# EAGLE board QTouchShield (EAGLE 6.2), part 1 of 2
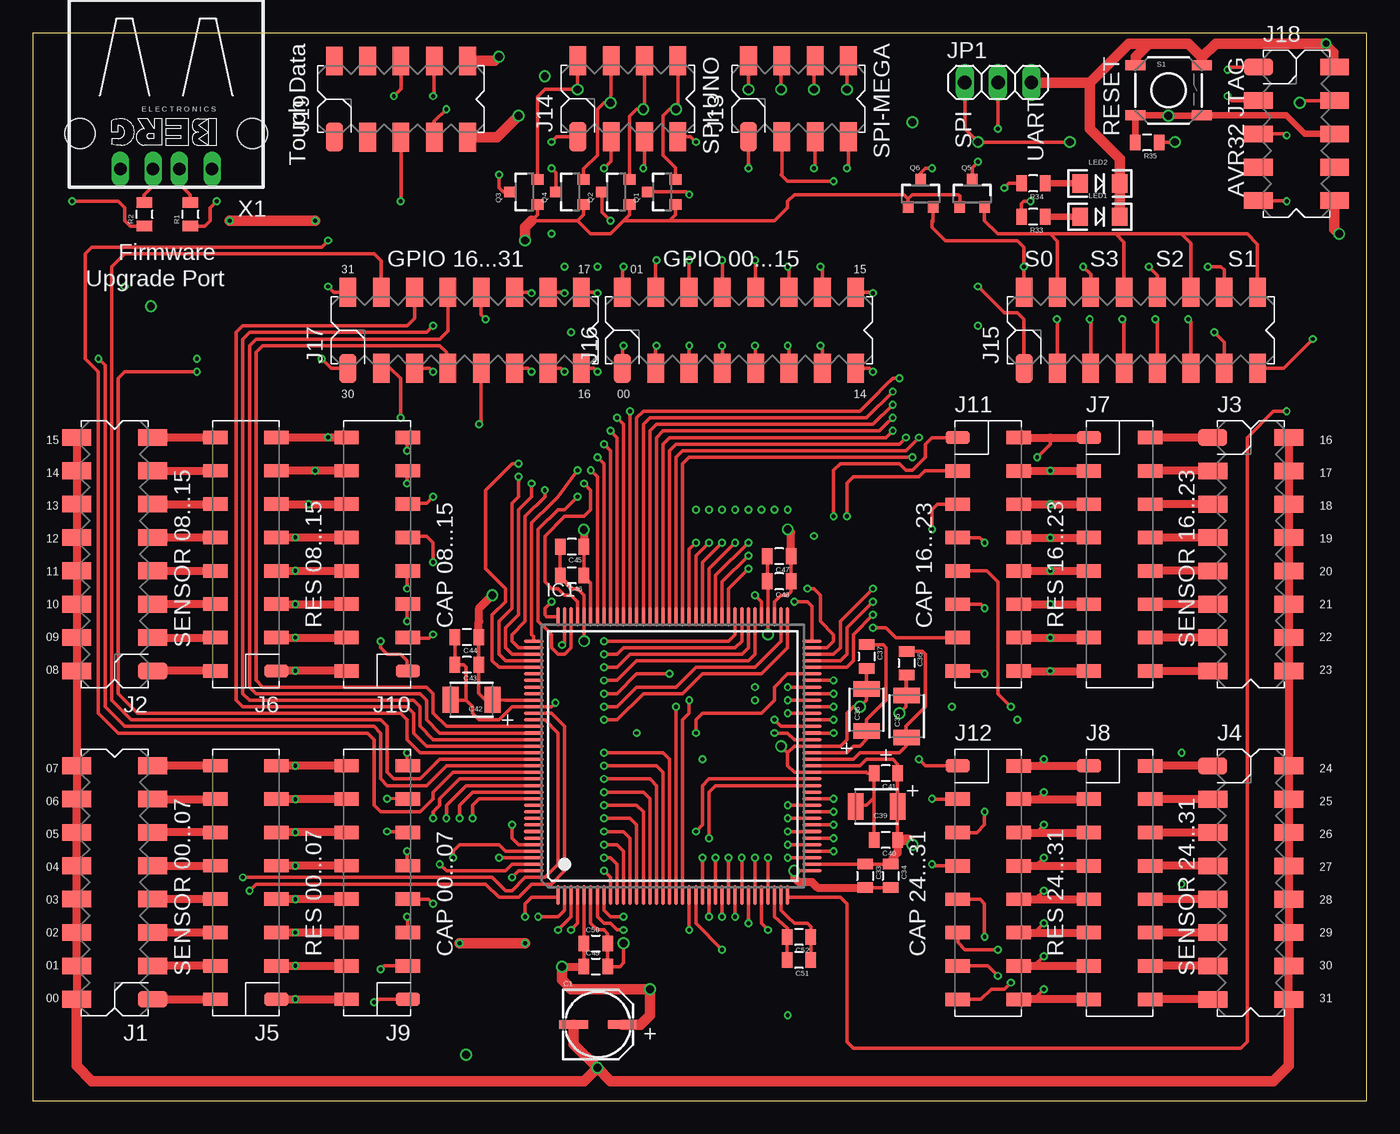
[diagram p0: board, top side]
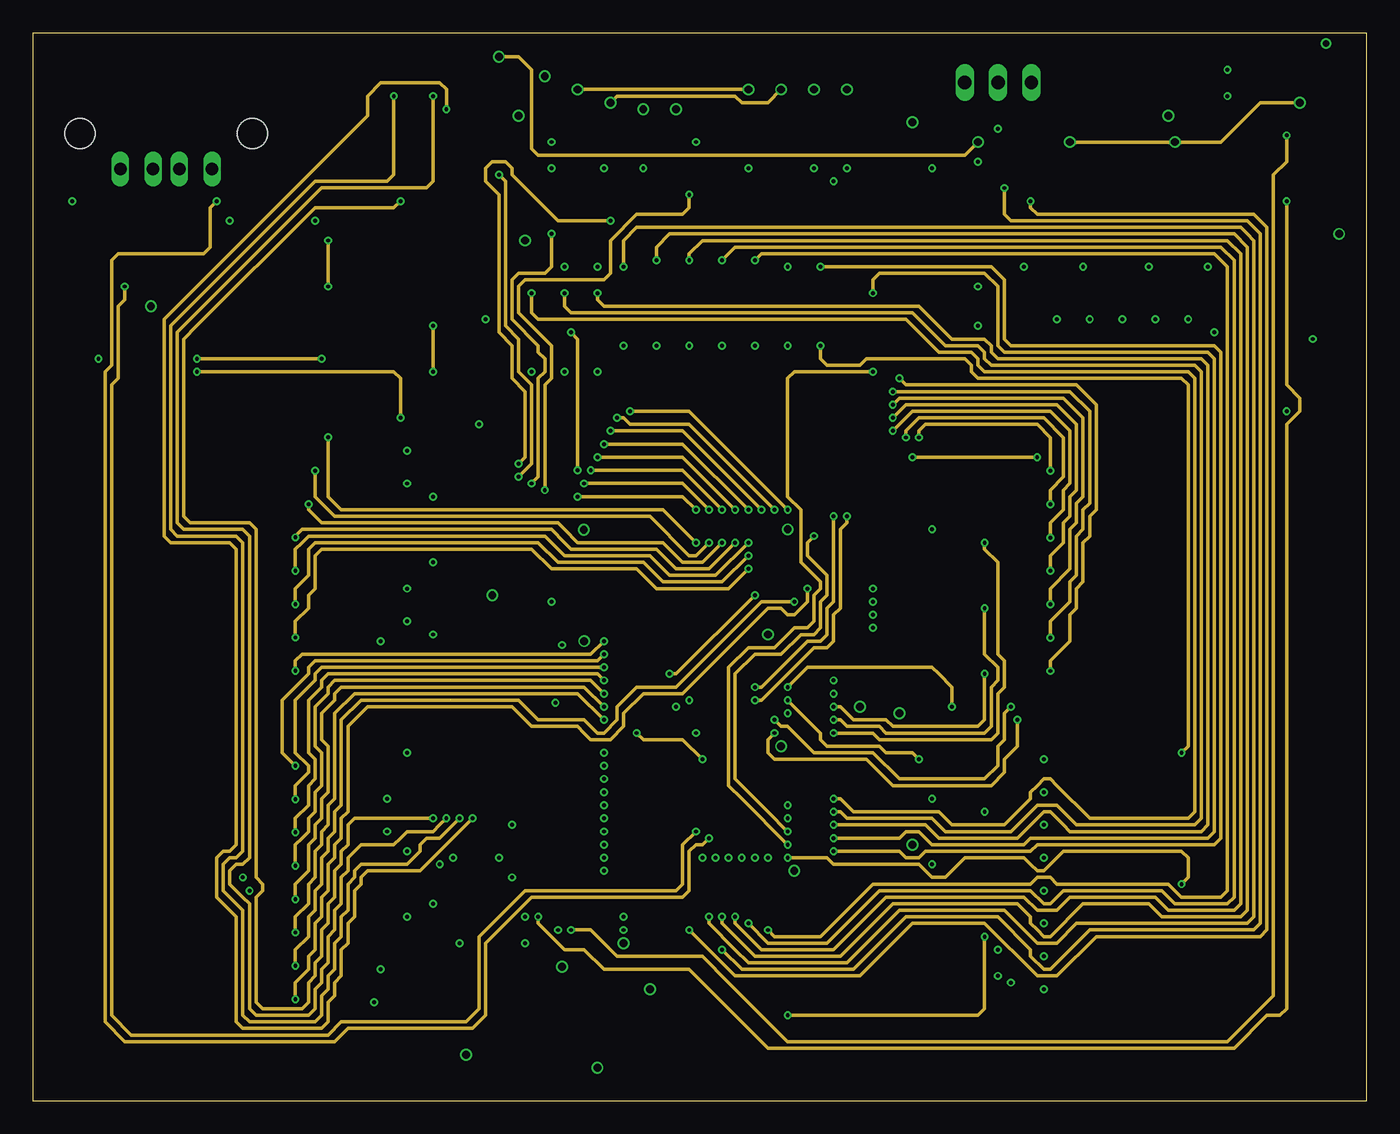
[diagram p1: board, inner layer Route2]
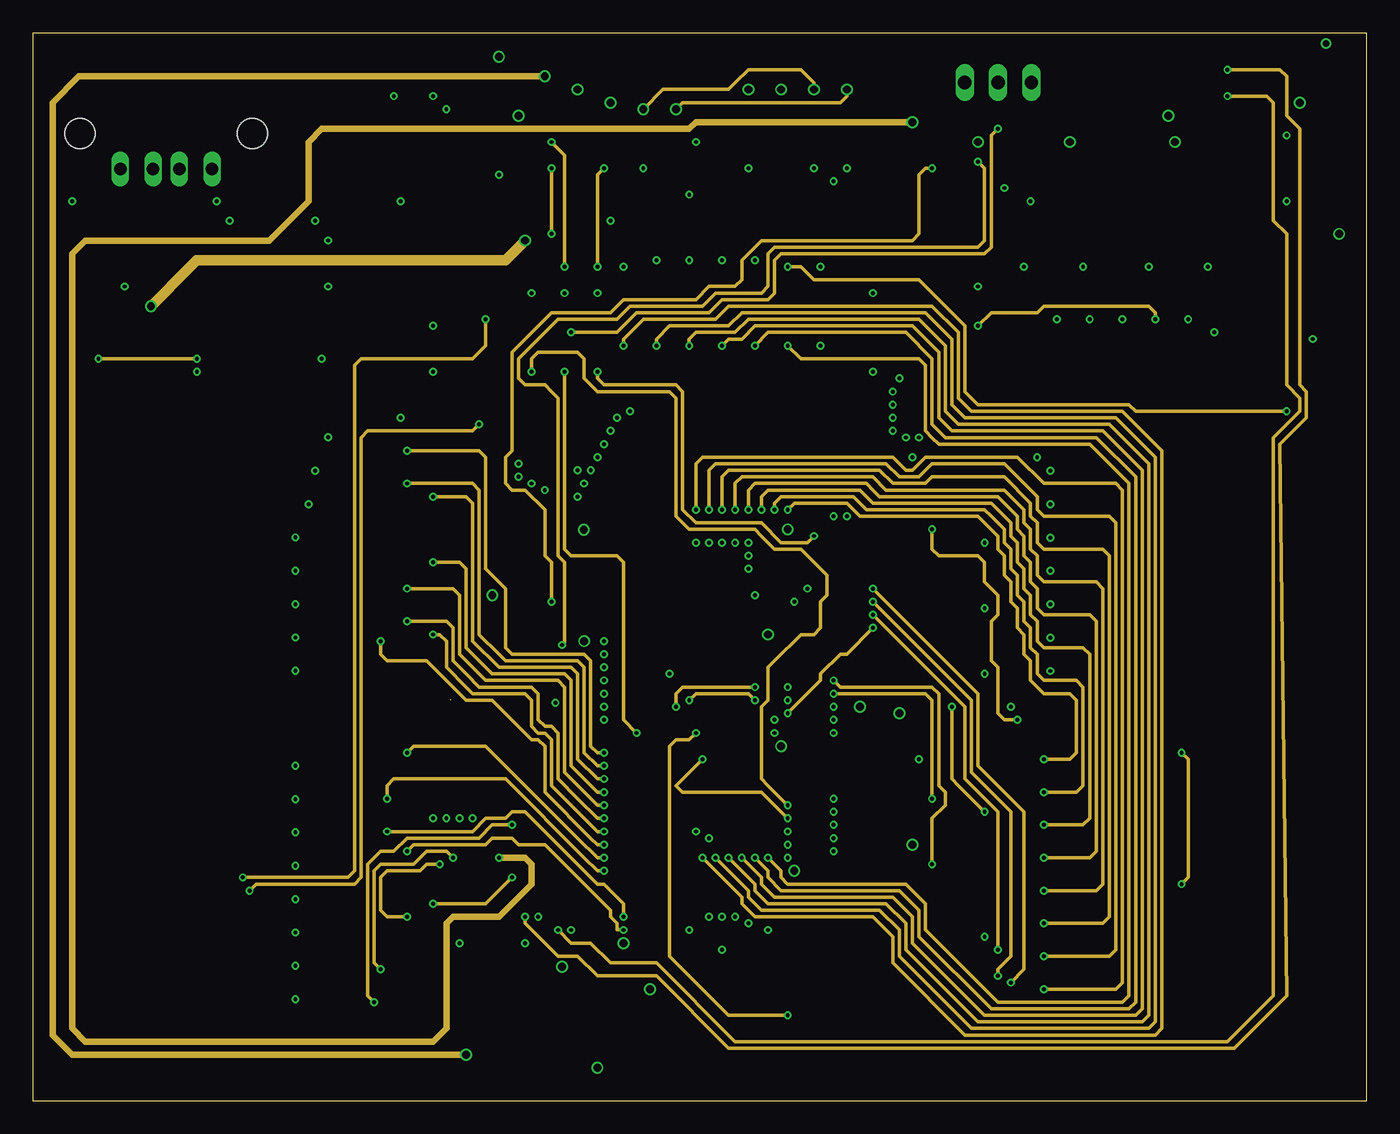
[diagram p2: board, inner layer Route15]
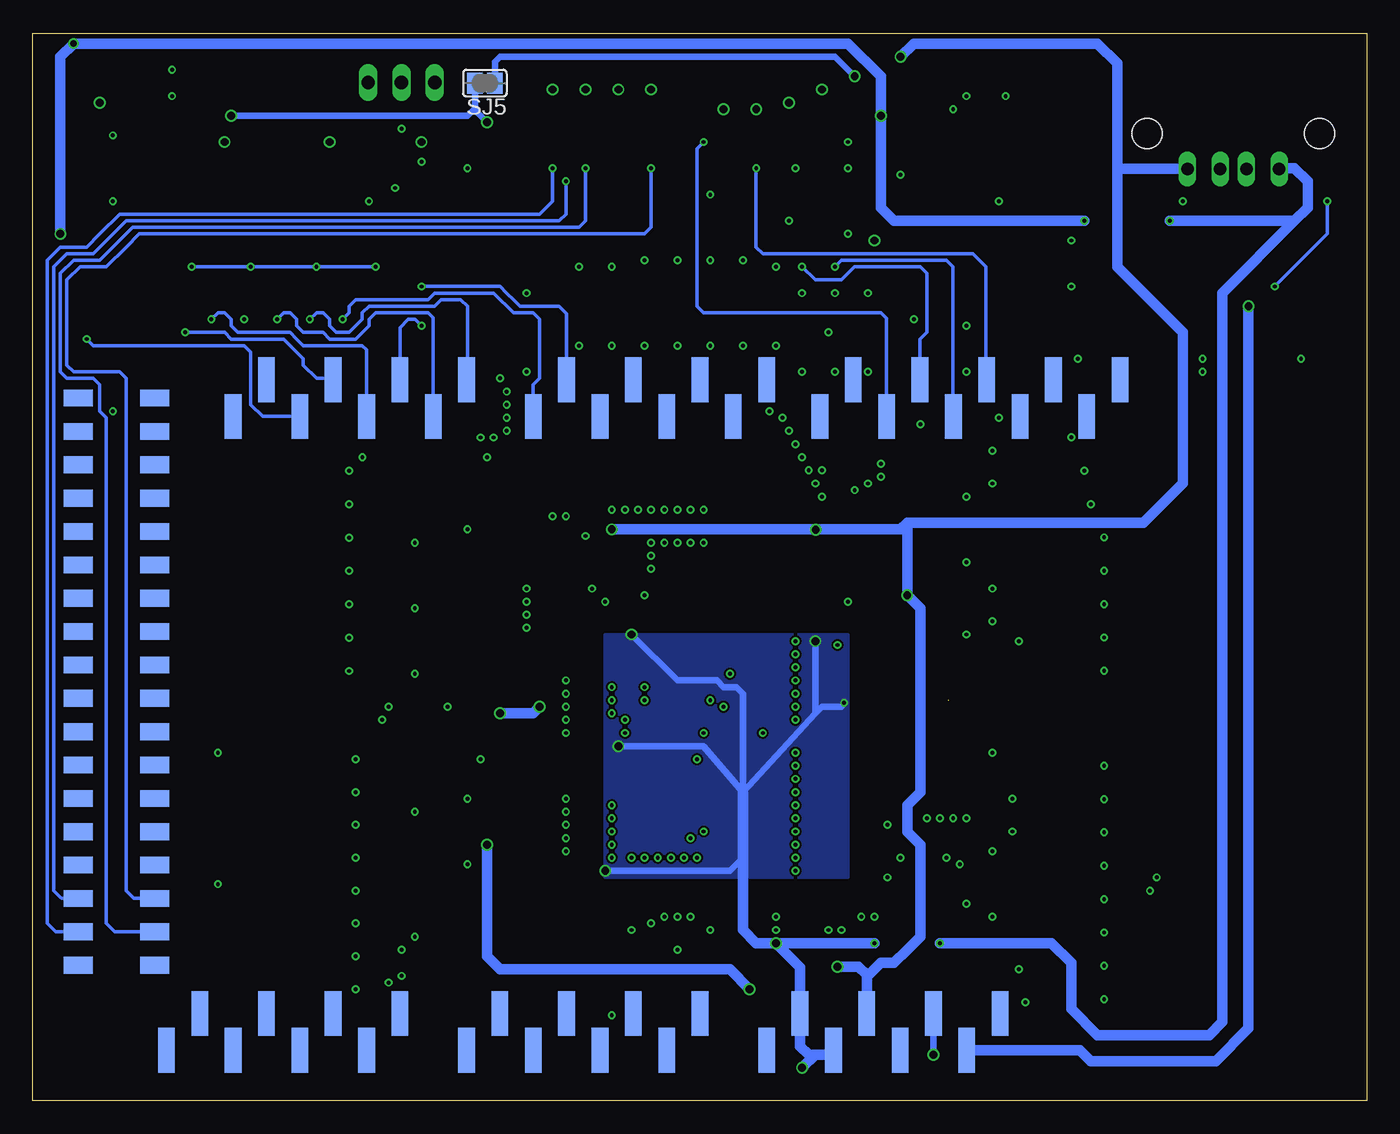
[diagram p3: board, bottom side, seen from below]

Size 101.6 x 81.28 mm. Coordinates in mm from the lower left corner, seen from the top.
Outline: 0,0 101.6,0 101.6,81.28 0,81.28 0,0
Copper layers (1*2+15*16): Top 0.035mm / dielectric 0.38mm / Route2 0.035mm / dielectric 0.71mm / Route15 0.035mm / dielectric 0.38mm / Bottom 0.035mm
Design rules: minimum track width 0.15mm, minimum drill 0.3mm, track to track 0.15mm, track to pad 0.15mm, pad to pad 0.15mm, via to via 0.15mm, smd to smd 0.15mm, copper to edge 0.3mm, drill to drill 0.2mm, minimum pad ring 0.2mm, minimum via ring 0.15mm, stop-mask expansion 0.075mm, vias tented up to drill 0mil, thermal gap 0.2mm

## Footprints (pad centres in the part's own frame; a part is rotated, then mirrored left to right if it is on the bottom)
PANASONIC_C = smd 2.2 x 0.65: + 1.9,-0.2; - -1.8,-0.2
0805 = smd 0.8 x 1.2: 1 -0.9,0; 2 0.9,0
1210 = smd 1.2 x 2: 1 -1.6,0; 2 1.6,0
LQFP144 = smd 0.25 x 1.5: 1 -8.75,-10.6; 2 -8.25,-10.6; 3 -7.75,-10.6; 4 -7.25,-10.6; 5 -6.75,-10.6; 6 -6.25,-10.6; 7 -5.75,-10.6; 8 -5.25,-10.6; 9 -4.75,-10.6; 10 -4.25,-10.6; 11 -3.75,-10.6; 12 -3.25,-10.6; 13 -2.75,-10.6; 14 -2.25,-10.6; 15 -1.75,-10.6; 16 -1.25,-10.6; 17 -0.75,-10.6; 18 -0.25,-10.6; 19 0.25,-10.6; 20 0.75,-10.6; 21 1.25,-10.6; 22 1.75,-10.6; 23 2.25,-10.6; 24 2.75,-10.6; 25 3.25,-10.6; 26 3.75,-10.6; 27 4.25,-10.6; 28 4.75,-10.6; 29 5.25,-10.6; 30 5.75,-10.6; 31 6.25,-10.6; 32 6.75,-10.6; 33 7.25,-10.6; 34 7.75,-10.6; 35 8.25,-10.6; 36 8.75,-10.6; 73 8.75,10.6; 74 8.25,10.6; 75 7.75,10.6; 76 7.25,10.6; 77 6.75,10.6; 78 6.25,10.6; 79 5.75,10.6; 80 5.25,10.6; 81 4.75,10.6; 82 4.25,10.6; 83 3.75,10.6; 84 3.25,10.6; 85 2.75,10.6; 86 2.25,10.6; 87 1.75,10.6; 88 1.25,10.6; 89 0.75,10.6; 90 0.25,10.6; 91 -0.25,10.6; 92 -0.75,10.6; 93 -1.25,10.6; 94 -1.75,10.6; 95 -2.25,10.6; 96 -2.75,10.6; 97 -3.25,10.6; 98 -3.75,10.6; 99 -4.25,10.6; 100 -4.75,10.6; 101 -5.25,10.6; 102 -5.75,10.6; 103 -6.25,10.6; 104 -6.75,10.6; 105 -7.25,10.6; 106 -7.75,10.6; 107 -8.25,10.6; 108 -8.75,10.6 | smd 1.5 x 0.25: 37 10.6,-8.75; 38 10.6,-8.25; 39 10.6,-7.75; 40 10.6,-7.25; 41 10.6,-6.75; 42 10.6,-6.25; 43 10.6,-5.75; 44 10.6,-5.25; 45 10.6,-4.75; 46 10.6,-4.25; 47 10.6,-3.75; 48 10.6,-3.25; 49 10.6,-2.75; 50 10.6,-2.25; 51 10.6,-1.75; 52 10.6,-1.25; 53 10.6,-0.75; 54 10.6,-0.25; 55 10.6,0.25; 56 10.6,0.75; 57 10.6,1.25; 58 10.6,1.75; 59 10.6,2.25; 60 10.6,2.75; 61 10.6,3.25; 62 10.6,3.75; 63 10.6,4.25; 64 10.6,4.75; 65 10.6,5.25; 66 10.6,5.75; 67 10.6,6.25; 68 10.6,6.75; 69 10.6,7.25; 70 10.6,7.75; 71 10.6,8.25; 72 10.6,8.75; 109 -10.6,8.75; 110 -10.6,8.25; 111 -10.6,7.75; 112 -10.6,7.25; 113 -10.6,6.75; 114 -10.6,6.25; 115 -10.6,5.75; 116 -10.6,5.25; 117 -10.6,4.75; 118 -10.6,4.25; 119 -10.6,3.75; 120 -10.6,3.25; 121 -10.6,2.75; 122 -10.6,2.25; 123 -10.6,1.75; 124 -10.6,1.25; 125 -10.6,0.75; 126 -10.6,0.25; 127 -10.6,-0.25; 128 -10.6,-0.75; 129 -10.6,-1.25; 130 -10.6,-1.75; 131 -10.6,-2.25; 132 -10.6,-2.75; 133 -10.6,-3.25; 134 -10.6,-3.75; 135 -10.6,-4.25; 136 -10.6,-4.75; 137 -10.6,-5.25; 138 -10.6,-5.75; 139 -10.6,-6.25; 140 -10.6,-6.75; 141 -10.6,-7.25; 142 -10.6,-7.75; 143 -10.6,-8.25; 144 -10.6,-8.75
2X8-V-MALE-SMT-HARWIN = smd 2.2 x 1.27: 1 -1.63,0; 2 4.17,0; 3 -1.63,-2.54; 4 4.17,-2.54; 5 -1.63,-5.08; 6 4.17,-5.08; 7 -1.63,-7.62; 8 4.17,-7.62; 9 -1.63,-10.16; 10 4.17,-10.16; 11 -1.63,-12.7; 12 4.17,-12.7; 13 -1.63,-15.24; 14 4.17,-15.24; 15 -1.63,-17.78; 16 4.17,-17.78
2X8-V-FEMALE-SMT-HARWIN = smd 1.85 x 1.02: 1 -1.055,0; 2 3.595,0; 3 -1.055,-2.54; 4 3.595,-2.54; 5 -1.055,-5.08; 6 3.595,-5.08; 7 -1.055,-7.62; 8 3.595,-7.62; 9 -1.055,-10.16; 10 3.595,-10.16; 11 -1.055,-12.7; 12 3.595,-12.7; 13 -1.055,-15.24; 14 3.595,-15.24; 15 -1.055,-17.78; 16 3.595,-17.78
2X4-V-MALE-SMT-HARWIN = smd 2.2 x 1.27: 1 -1.63,0; 2 4.17,0; 3 -1.63,-2.54; 4 4.17,-2.54; 5 -1.63,-5.08; 6 4.17,-5.08; 7 -1.63,-7.62; 8 4.17,-7.62
2X5-V-MALE-SMT-HARWIN = smd 2.2 x 1.27: 1 -1.63,0; 2 4.17,0; 3 -1.63,-2.54; 4 4.17,-2.54; 5 -1.63,-5.08; 6 4.17,-5.08; 7 -1.63,-7.62; 8 4.17,-7.62; 9 -1.63,-10.16; 10 4.17,-10.16
1X03 = drill 1.016 long: 1 -2.54,0; 2 0,0; 3 2.54,0
LED-1206 = smd 1.2 x 1.4: A -1.5,0; C 1.5,0
SOT23-3 = smd 0.8 x 0.9: 1 -0.95,-1; 2 0.95,-1; 3 0,1.1
TACTILE_SWITCH_SMD = smd 1.524 x 0.762: 1 -2.54,1.905; 2 2.54,1.905; 3 -2.54,-1.905; 4 2.54,-1.905
SJ = smd 1.168 x 1.6: 1 -0.762,0; 2 0.762,0
ARDUINO-2560-R3-SMD = smd 1.27 x 3.4 bottom: 3V3 -60.96,-49.66; 5V_1 -58.42,-46.86; A00 -45.72,-46.86; A01 -43.18,-49.66; A02 -40.64,-46.86; A03 -38.1,-49.66; A04 -35.56,-46.86; A05 -33.02,-49.66; A06 -30.48,-46.86; A07 -27.94,-49.66; A08 -22.86,-46.86; A09 -20.32,-49.66; A10 -17.78,-46.86; A11 -15.24,-49.66; A12 -12.7,-46.86; A13 -10.16,-49.66; A14 -7.62,-46.86; A15 -5.08,-49.66; AREF -72.635,1.4; GND_1 -55.88,-49.66; GND_2 -53.34,-46.86; GND_5 -70.095,-1.4; IOREF -66.04,-49.66; NC -68.58,-46.86; PWM02 -38.1,-1.4; PWM03 -40.64,1.4; PWM04 -43.18,-1.4; PWM05 -45.72,1.4; PWM06 -48.26,-1.4; PWM07 -50.8,1.4; PWM08 -54.855,-1.4; PWM09 -57.395,1.4; PWM10 -59.935,-1.4; PWM11 -62.475,1.4; PWM12 -65.015,-1.4; PWM13 -67.555,1.4; RESET -63.5,-46.86; RX1_19 -15.24,-1.4; RX2_17 -20.32,-1.4; RX3_15 -25.4,-1.4; RX_PWM00 -33.02,-1.4; SCA -75.175,-1.4; SCA_20 -12.7,1.4; SCL -77.715,1.4; SCL_21 -10.16,-1.4; TX1_18 -17.78,1.4; TX2_16 -22.86,1.4; TX3_14 -27.94,1.4; TX_PWM01 -35.56,1.4; VIN -50.8,-49.66 | smd 2.2 x 1.27 bottom: 5V_2 -4.17,0; 5V_3 1.63,0; 22 -4.17,-2.54; 23 1.63,-2.54; 24 -4.17,-5.08; 25 1.63,-5.08; 26 -4.17,-7.62; 27 1.63,-7.62; 28 -4.17,-10.16; 29 1.63,-10.16; 30 -4.17,-12.7; 31 1.63,-12.7; 32 -4.17,-15.24; 33 1.63,-15.24; 34 -4.17,-17.78; 35 1.63,-17.78; 36 -4.17,-20.32; 37 1.63,-20.32; 38 -4.17,-22.86; 39 1.63,-22.86; 40 -4.17,-25.4; 41 1.63,-25.4; 42 -4.17,-27.94; 43 1.63,-27.94; 44 -4.17,-30.48; 45 1.63,-30.48; 46 -4.17,-33.02; 47 1.63,-33.02; 48 -4.17,-35.56; 49 1.63,-35.56; 50 -4.17,-38.1; 51 1.63,-38.1; 52 -4.17,-40.64; 53 1.63,-40.64; GND_3 -4.17,-43.18; GND_4 1.63,-43.18
PN87520 = drill 0.95 long: 1 -3.5,2.71; 2 -1,2.71; 3 1,2.71; 4 3.5,2.71 | hole 2.3: -6.57,0; 6.57,0

## Placement (x,y rotation side)
C1  10uF/35V  [PANASONIC_C]  43,6 0 top
C33  100nF  [0805]  63.4,17.12 270 top
C34  33nF  [0805]  65.34,17.12 270 top
C35  2.2uF  [1210]  66.56,29.26 90 top
C36  470pF  [0805]  66.56,33.32 270 top
C37  470pF  [0805]  63.51,33.82 270 top
C38  2.2uF  [1210]  63.51,29.76 90 top
C39  4.7uF  [1210]  64.27,22.4 180 top
C40  100nF  [0805]  64.97,19.86 180 top
C41  33nF  [0805]  64.97,24.94 180 top
C42  4.7uF  [1210]  33.42,30.53 180 top
C43  100nF  [0805]  33.06,33.2 180 top
C44  33nF  [0805]  33.06,35.3 180 top
C45  100nF  [0805]  41.07,42.19 180 top
C46  33nF  [0805]  41.07,39.98 180 top
C47  100nF  [0805]  56.85,41.45 180 top
C48  33nF  [0805]  56.85,39.55 180 top
C49  100nF  [0805]  42.88,10.22 0 top
C50  33nF  [0805]  42.88,11.97 0 top
C51  100nF  [0805]  58.36,10.72 180 top
C52  33nF  [0805]  58.36,12.47 180 top
IC1  AT32UC3C0512CJEDEC-MS-026  [LQFP144]  48.75,26.25 0 top
J1  SENSOR 00...07  [2X8-V-MALE-SMT-HARWIN]  7.5,7.73 180 top
J2  SENSOR 08...15  [2X8-V-MALE-SMT-HARWIN]  7.5,32.73 180 top
J3  SENSOR 16...23  [2X8-V-MALE-SMT-HARWIN]  91.5,50.5 0 top
J4  SENSOR 24...31  [2X8-V-MALE-SMT-HARWIN]  91.5,25.5 0 top
J5  RES 00...07  [2X8-V-FEMALE-SMT-HARWIN]  17.5,7.73 180 top
J6  RES 08...15  [2X8-V-FEMALE-SMT-HARWIN]  17.5,32.73 180 top
J7  RES 16...23  [2X8-V-FEMALE-SMT-HARWIN]  81.5,50.5 0 top
J8  RES 24...31  [2X8-V-FEMALE-SMT-HARWIN]  81.5,25.5 0 top
J9  CAP 00...07  [2X8-V-FEMALE-SMT-HARWIN]  27.5,7.73 180 top
J10  CAP 08...15  [2X8-V-FEMALE-SMT-HARWIN]  27.5,32.73 180 top
J11  CAP 16...23  [2X8-V-FEMALE-SMT-HARWIN]  71.5,50.5 0 top
J12  CAP 24...31  [2X8-V-FEMALE-SMT-HARWIN]  71.5,25.5 0 top
J13  SPI-MEGA  [2X4-V-MALE-SMT-HARWIN]  54.51,75.03 90 top
J14  SPI-UNO  [2X4-V-MALE-SMT-HARWIN]  41.51,75.03 90 top
J15  COMMS Select  [2X8-V-MALE-SMT-HARWIN]  75.5,57.4 90 top
J16  DETECT00...15  [2X8-V-MALE-SMT-HARWIN]  44.9,57.4 90 top
J17  DETECT16...31  [2X8-V-MALE-SMT-HARWIN]  24,57.4 90 top
J18  JTAG  [2X5-V-MALE-SMT-HARWIN]  94.98,78.7 0 top
J19  TOUCH DATA  [2X5-V-MALE-SMT-HARWIN]  22.96,75 90 top
JP1  COMMS_SELECT  [1X03]  73.52,77.54 0 top
LED1  Yellow  [LED-1206]  81.28,67.31 0 top
LED2  Green  [LED-1206]  81.28,69.85 0 top
Q1  BSS138  [SOT23-3]  47.95,69.2 90 top
Q2  BSS138  [SOT23-3]  44.45,69.2 90 top
Q3  BSS138  [SOT23-3]  37.45,69.2 90 top
Q4  BSS138  [SOT23-3]  40.95,69.2 90 top
Q5  BSS138  [SOT23-3]  71.56,69.05 0 top
Q6  BSS138  [SOT23-3]  67.62,69.05 0 top
R1  39R  [0805]  12,67.5 90 top
R2  39R  [0805]  8.5,67.5 90 top
R33  470Ohm  [0805]  76.2,67.31 180 top
R34  470Ohm  [0805]  76.2,69.85 180 top
R35  10K  [0805]  84.87,72.96 180 top
S1  RESET  [TACTILE_SWITCH_SMD]  86.51,76.93 0 top
SJ5  RESET-LINK  [SJ]  67.17,77.48 180 bottom
U1  ARDUINO-2560-MEGA-R3-SMD  [ARDUINO-2560-R3-SMD]  96.5,53.5 0 top
X1  Firmware Upgrade Port  [PN87520]  10.16,73.66 180 top

## Library data of the parts
C1 C33-C52 LED1 LED2 Q1-Q6 R1 R2 R33-R35 S1 = SparkFun
IC1 = atmel-AVR32
J1-J19 U1 = codinghead
JP1 = pinhead
SJ5 = jumper
X1 = con-berg; OC_FARNELL: unknown; OC_NEWARK: unknown

## Nets
ADCVREFN: C51.1 C52.1 IC1.35
ADCVREFP: C51.2 C52.2 IC1.34
ADT-SPI0-MISO: J13.2 J14.2 Q3.2
ADT-SPI0-MOSI: J13.4 J14.4 Q4.2
ADT-SPI0-SCK: J13.6 J14.6 Q2.2
ADT-SPI0-SS: J13.8 J14.8 Q1.2
ADT-USART0-RXD: J15.4 J15.8 J15.12 J15.16 Q5.2
ADT-USART0-TXD: J15.2 J15.6 J15.10 J15.14 Q6.2
ARDUINO_RESET: SJ5.1 U1.RESET
GND: C1.- C33.2 C34.2 C35.2 C36.2 C37.2 C38.2 C39.2 C40.2 C41.2 C42.2 C43.2 C44.2 C45.2 C46.2 C47.2 C48.2 C49.2 C50.2 IC1.6 IC1.37 IC1.52 IC1.56 IC1.76 IC1.104 IC1.119 J1.2 J1.4 J1.6 J1.8 J1.10 J1.12 J1.14 J1.16 J2.2 J2.4 J2.6 J2.8 J2.10 J2.12 J2.14 J2.16 J3.2 J3.4 J3.6 J3.8 J3.10 J3.12 J3.14 J3.16 J4.2 J4.4 J4.6 J4.8 J4.10 J4.12 J4.14 J4.16 J18.2 J18.10 J19.9 JP1.3 LED1.C LED2.C S1.1 S1.2 U1.GND_1 U1.GND_2 X1.4
IOREF: Q1.1 Q2.1 Q3.1 Q4.1 Q5.1 Q6.1 U1.IOREF
JTAG_RESET: IC1.142 J18.6 R35.2 S1.3 S1.4 SJ5.2
JTAG_TCK: IC1.1 J18.1
JTAG_TDI: IC1.2 J18.9
JTAG_TDO: IC1.3 J18.3
JTAG_TMS: IC1.4 J18.5
MISO-MEGA: J13.1 U1.50
MISO-UNO: J14.1 U1.PWM12
MOSI-MEGA: J13.3 U1.51
MOSI-UNO: J14.3 U1.PWM11
N$1: LED1.A R33.1
N$2: J4.15 J8.16
N$3: J4.13 J8.14
N$4: J4.11 J8.12
N$5: J4.9 J8.10
N$6: J4.7 J8.8
N$7: J4.5 J8.6
N$8: J4.3 J8.4
N$9: J4.1 J8.2
N$10: J3.15 J7.16
N$11: J3.13 J7.14
N$12: J3.11 J7.12
N$13: J3.9 J7.10
N$14: J3.7 J7.8
N$15: J3.5 J7.6
N$16: J3.3 J7.4
N$17: J3.1 J7.2
N$18: J2.15 J6.16
N$19: J2.13 J6.14
N$20: J2.11 J6.12
N$21: J2.9 J6.10
N$22: J2.7 J6.8
N$23: J2.5 J6.6
N$24: J2.3 J6.4
N$25: J2.1 J6.2
N$26: J1.15 J5.16
N$27: J1.13 J5.14
N$28: J1.11 J5.12
N$29: J1.9 J5.10
N$30: J1.7 J5.8
N$31: J1.5 J5.6
N$32: J1.3 J5.4
N$33: J1.1 J5.2
N$34: R1.2 X1.2
N$35: R2.2 X1.3
N$42: LED2.A R34.1
QT-DETECT-GENERAL: IC1.21 R33.2
RX0: J15.3 U1.RX_PWM00
RX1: J15.15 U1.RX1_19
RX2: J15.11 U1.RX2_17
RX3: J15.7 U1.RX3_15
SCK-MEGA: J13.5 U1.52
SCK-UNO: J14.5 U1.PWM13
SDT-SPI0-MISO: IC1.112 Q3.3
SDT-SPI0-MOSI: IC1.111 Q4.3
SDT-SPI0-SCK: IC1.113 Q2.3
SDT-SPI0-SS: IC1.110 Q1.3
SDT-USART0-RXD: IC1.108 Q6.3
SDT-USART0-TXD: IC1.107 Q5.3
SHIELD-DATA-TRANSFER-COM-SELECT: IC1.109 JP1.2
SHIELD-DATA-TRANSFER-VISUAL-OUTPUT: IC1.22 R34.2
SHIELD-DETECT0: IC1.23 J16.1
SHIELD-DETECT1: IC1.24 J16.2
SHIELD-DETECT2: IC1.25 J16.3
SHIELD-DETECT3: IC1.26 J16.4
SHIELD-DETECT4: IC1.27 J16.5
SHIELD-DETECT5: IC1.28 J16.6
SHIELD-DETECT6: IC1.29 J16.7
SHIELD-DETECT7: IC1.30 J16.8
SHIELD-DETECT8: IC1.31 J16.9
SHIELD-DETECT9: IC1.32 J16.10
SHIELD-DETECT10: IC1.33 J16.11
SHIELD-DETECT11: IC1.36 J16.12
SHIELD-DETECT12: IC1.39 J16.13
SHIELD-DETECT13: IC1.40 J16.14
SHIELD-DETECT14: IC1.41 J16.15
SHIELD-DETECT15: IC1.42 J16.16
SHIELD-DETECT16: IC1.43 J17.15
SHIELD-DETECT17: IC1.44 J17.16
SHIELD-DETECT18: IC1.45 J17.13
SHIELD-DETECT19: IC1.46 J17.14
SHIELD-DETECT20: IC1.47 J17.11
SHIELD-DETECT21: IC1.48 J17.12
SHIELD-DETECT22: IC1.120 J17.9
SHIELD-DETECT23: IC1.121 J17.10
SHIELD-DETECT24: IC1.122 J17.7
SHIELD-DETECT25: IC1.123 J17.8
SHIELD-DETECT26: IC1.124 J17.5
SHIELD-DETECT27: IC1.125 J17.6
SHIELD-DETECT28: IC1.126 J17.3
SHIELD-DETECT29: IC1.127 J17.4
SHIELD-DETECT30: IC1.128 J17.1
SHIELD-DETECT31: IC1.129 J17.2
SNS0: IC1.140 J9.1
SNS1: IC1.141 J9.3
SNS2: IC1.143 J9.5
SNS3: IC1.144 J9.7
SNS4: IC1.7 J9.9
SNS5: IC1.8 J9.11
SNS6: IC1.9 J9.13
SNS7: IC1.10 J9.15
SNS8: IC1.11 J10.1
SNS9: IC1.12 J10.3
SNS10: IC1.13 J10.5
SNS11: IC1.14 J10.7
SNS12: IC1.15 J10.9
SNS13: IC1.16 J10.11
SNS14: IC1.17 J10.13
SNS15: IC1.18 J10.15
SNS16: IC1.19 J11.1
SNS17: IC1.20 J11.3
SNS18: IC1.57 J11.5
SNS19: IC1.58 J11.7
SNS20: IC1.59 J11.9
SNS21: IC1.60 J11.11
SNS22: IC1.61 J11.13
SNS23: IC1.62 J11.15
SNS24: IC1.63 J12.1
SNS25: IC1.64 J12.3
SNS26: IC1.65 J12.5
SNS27: IC1.66 J12.7
SNS28: IC1.67 J12.9
SNS29: IC1.68 J12.11
SNS30: IC1.69 J12.13
SNS31: IC1.70 J12.15
SNSK0: IC1.71 J5.1 J9.2
SNSK1: IC1.72 J5.3 J9.4
SNSK2: IC1.73 J5.5 J9.6
SNSK3: IC1.74 J5.7 J9.8
SNSK4: IC1.77 J5.9 J9.10
SNSK5: IC1.78 J5.11 J9.12
SNSK6: IC1.79 J5.13 J9.14
SNSK7: IC1.80 J5.15 J9.16
SNSK8: IC1.81 J6.1 J10.2
SNSK9: IC1.82 J6.3 J10.4
SNSK10: IC1.83 J6.5 J10.6
SNSK11: IC1.84 J6.7 J10.8
SNSK12: IC1.85 J6.9 J10.10
SNSK13: IC1.86 J6.11 J10.12
SNSK14: IC1.87 J6.13 J10.14
SNSK15: IC1.88 J6.15 J10.16
SNSK16: IC1.89 J7.1 J11.2
SNSK17: IC1.90 J7.3 J11.4
SNSK18: IC1.91 J7.5 J11.6
SNSK19: IC1.92 J7.7 J11.8
SNSK20: IC1.93 J7.9 J11.10
SNSK21: IC1.94 J7.11 J11.12
SNSK22: IC1.95 J7.13 J11.14
SNSK23: IC1.96 J7.15 J11.16
SNSK24: IC1.97 J8.1 J12.2
SNSK25: IC1.98 J8.3 J12.4
SNSK26: IC1.99 J8.5 J12.6
SNSK27: IC1.100 J8.7 J12.8
SNSK28: IC1.101 J8.9 J12.10
SNSK29: IC1.102 J8.11 J12.12
SNSK30: IC1.105 J8.13 J12.14
SNSK31: IC1.106 J8.15 J12.16
SS-MEGA: J13.7 U1.53
SS-UNO: J14.7 U1.PWM10
TOUCH_DATA-MISO: IC1.133 J19.7
TOUCH_DATA-MOSI: IC1.132 J19.6
TOUCH_DATA-SCK: IC1.131 J19.8
TOUCH_DATA-SS: IC1.130 J19.5
TX0: J15.1 U1.TX_PWM01
TX1: J15.13 U1.TX1_18
TX2: J15.9 U1.TX2_16
TX3: J15.5 U1.TX3_14
USB-DM: IC1.50 R1.1
USB-DP: IC1.51 R2.1
VCC: C1.+ C33.1 C34.1 C39.1 C40.1 C41.1 C42.1 C43.1 C44.1 C45.1 C46.1 C47.1 C48.1 C49.1 C50.1 IC1.5 IC1.38 IC1.53 IC1.75 IC1.103 IC1.118 J18.4 J19.10 JP1.1 R35.1 U1.5V_1 X1.1
VDDCORE: C37.1 C38.1 IC1.55
VDDIN_33: C35.1 C36.1 IC1.54